# Altium PCB relay.PcbDoc
Units mil, origin at the board's own origin, x right, y up, seen from the top; angles counter-clockwise.
Board outline 787.4 x 2755.91 mil, 2 copper layers (Top Layer, Bottom Layer); 6 components, 5 nets, 14 pads, 0 vias.
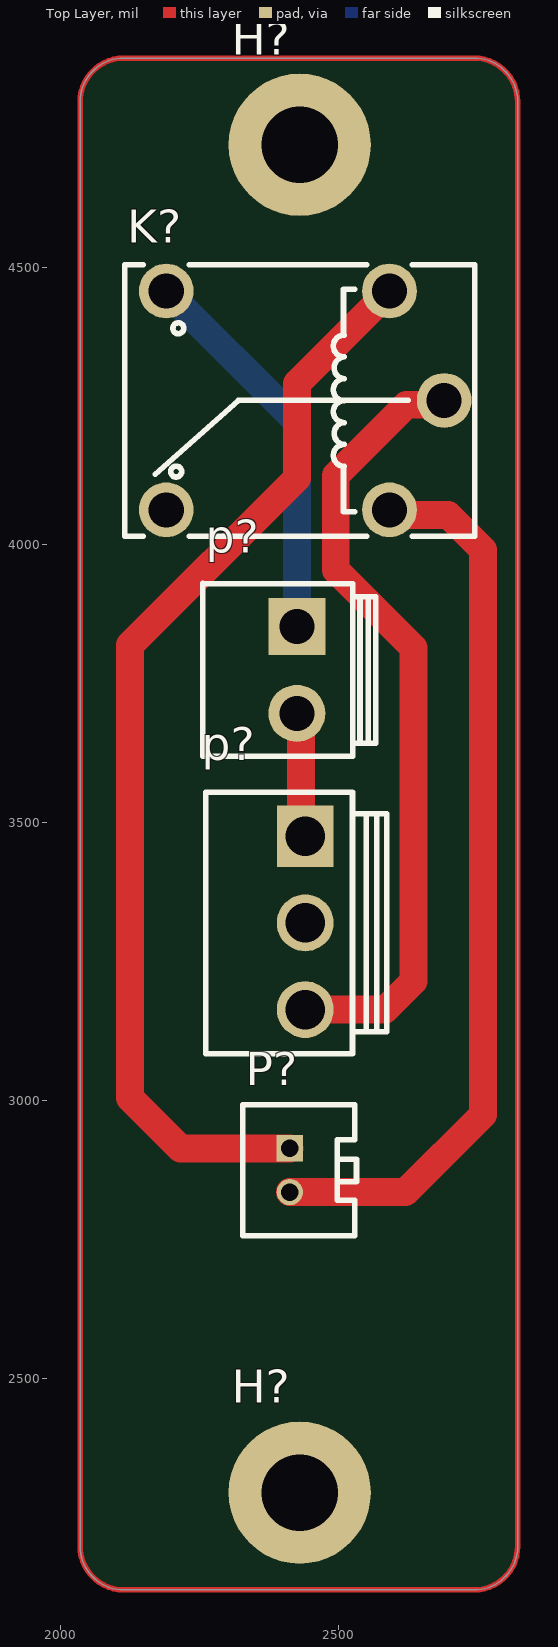
[diagram p0: Top Layer view]
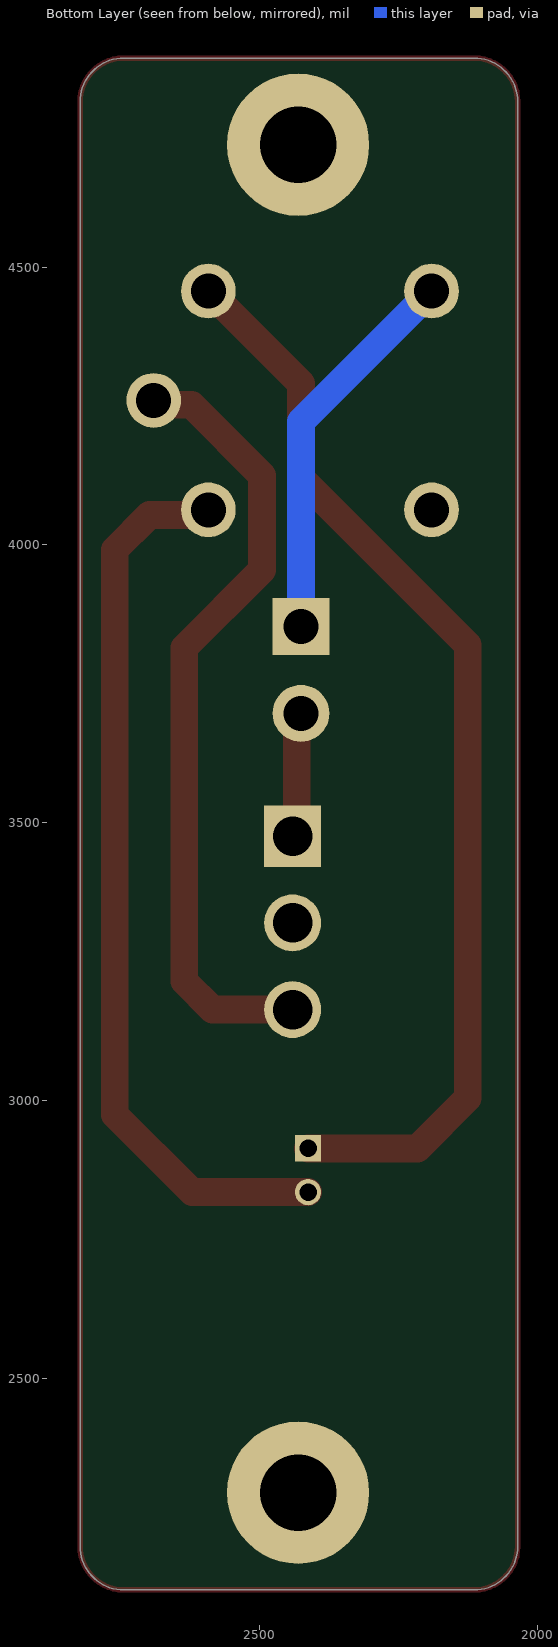
[diagram p1: Bottom Layer view, seen from below]
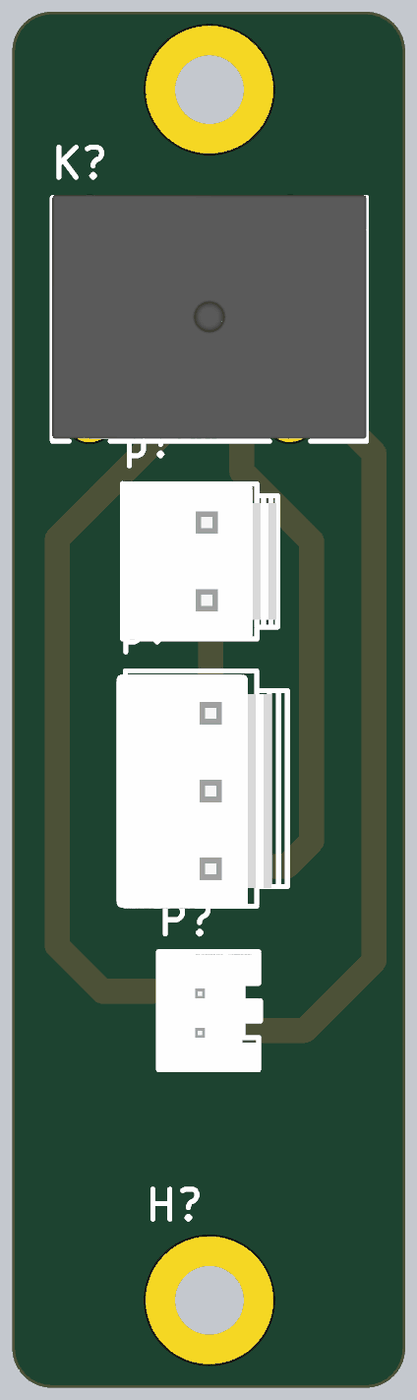
[diagram p2: 3D render of the assembled board from above, using the file's embedded part models]

## Layer stack, top to bottom
Top Solder: solder mask 0.4, Solder Resist, Dk 3.5
Top Layer: signal copper 1.4
Dielectric 1: dielectric 12.6, FR-4, Dk 4.8
Bottom Layer: signal copper 1.4
Bottom Solder: solder mask 0.4, Solder Resist, Dk 3.5

## Board outline
2035,2198.74 2035,4797.17 cw(c2113.74,4797.17) 2113.74,4875.91 2743.66,4875.91 cw(c2743.66,4797.17) 2822.4,4797.17 2822.4,2198.74 cw(c2743.66,2198.74) 2743.66,2120 2113.74,2120 cw(c2113.74,2198.74)

## Design rules (kind name [scope] priority, off if disabled: settings)
Clearance [All] p1: gap=6 ignorepadtopadclearanceinfootprint=FALSE
PlaneClearance [All] p1: clearance=3
PlaneConnect [All] p1: planeconnectstyle=Direct reliefexpansion=20 reliefentries=4 reliefconductorwidth=10 reliefairgap=10
PolygonConnect [All] p1: connectstyle=Direct reliefconductorwidth=10 reliefentries=4 polygonreliefangle="90 Angle" airgapwidth=10
RoutingVias [All] p1: holewidth=28 width=50 viastyle="Through Hole" minholewidth=28 minwidth=50 maxholewidth=28 maxwidth=50
SolderMaskExpansion [All] p1: expansion=4 istentingtop=FALSE
Width [All] p1: maxlimit=50 minlimit=6 preferedwidth=10
28 further rules are at their usual default settings.

## Components (designator, comment, footprint, x,y, rotation, side; value= is the part's Value field where it differs from the comment)
H? "HOLE" HOLE_3.5mm 2430.16,4720 r0 top
H? "HOLE" HOLE_3.5mm 2430.16,2295 r0 top
K? "SRA-12VDC-CL" RELAY-TH_SRA-X-CX 2440,4260 r180 top
p? "ZX-VH3.96-2PZZ" CONN-TH_2P-P3.96_MEGASTAR_ZX-VH3.96-2PZZ 2425,3775 r270 top
p? "ZX-VH3.96-3PZZ" CONN-TH_3P-P3.96_FWF39601-S03S22W1B 2440,3320 r270 top
P? "ZX-HY2.0-2PZZ" CONN-TH_2P-P2.00_ZX-HY2.0-2PZZ 2412.31,2875 r90 top

## Footprints (in the part's own frame and the unit in brackets; to place one, negate y for a bottom-side part, rotate by r counter-clockwise, add the part's x,y. Pads: shape width x height; smd on the part's side, far side on the other; paste and mask are expansions set on the pad)
CONN-TH_2P-P2.00_ZX-HY2.0-2PZZ [mm]
  rect 1.2x1.2 hole 0.8: 1(1,0)
  round 1.2 hole 0.8: 2(-1,0)
  silkscreen extent -3,-3.05 3,2.14, body extent -3.13,-2.93 2.88,2.17, height 8
CONN-TH_2P-P3.96_MEGASTAR_ZX-VH3.96-2PZZ [mm]
  rect 2.6x2.6 hole 1.6 paste-2539.97 mask+0.05: 1(-1.98,0)
  round 2.6 hole 1.6 paste-2539.97 mask+0.05: 2(1.98,0)
  silkscreen extent -3.96,-4.3 3.94,3.6, body extent -3.96,-4.35 3.97,3.55, height 2.65
CONN-TH_3P-P3.96_FWF39601-S03S22W1B [mm]
  rect 2.8x2.6 hole 1.8: 1(-3.96,0)
  round 2.6 hole 1.8: 2(0,0) 3(3.96,0)
  silkscreen extent -5.98,-4.54 5.98,3.72, body extent -5.81,-4.99 6.08,2.91, height 12.21
HOLE_3.5mm [mm]
  round 6.5 hole 3.5: 1(0,0)
RELAY-TH_SRA-X-CX [mm]
  round 2.5 hole 1.6: 1(6.35,-5) 2(6.35,5) 3(-3.851,5) 4(-3.851,-5) 5(-6.35,-0.001)
  silkscreen extent -7.75,-6.2 8.25,6.2, body extent -7.75,-6.33 8.25,6.08, height 14.5

## Part data
H? H?: "固定孔"
K?: library part 继电器, "12v", Coil Rated Power=600mW, Coil Resistance=240Ω, Coil Voltage=12V, Contact Rating=-, Contact Resistance=100mΩ, JLCPCB Part Class="Extended Part", LCSC Part Name=黑色, Manufacturer=松乐, Maximum Switching Current=10A, Maximum Switching Voltage=125V@AC, Operating Temperature=-40℃~+85℃, Add into BOM=yes, Coil Type=无极性-单线圈, Contact Form=一组转换:1C(单刀双掷-转换), Convert to PCB=yes, Datasheet=https://atta.szlcsc.com/upload/public/pdf/source/20180525/C99666_083B3C24D5AD4D7A00C20E2707DD072C.pdf, Device=SRA-12VDC-CL, Manufacturer Part=SRA-12VDC-CL, Operate Time=10ms, Pin Number=5, Release Time=10ms, Supplier=LCSC, Supplier Footprint=插件,12.4x16mm, Supplier Part=C60169, Symbol=SRA-12VDC-CL
p?: library part VH3.96-2PZZ, "2p", Current Rating (Max)=3A, JLCPCB Part Class="Extended Part", Manufacturer=Megastar(兆星), Operating Temperature Range=-25℃~+85℃, Add into BOM=yes, Contact Material=黄铜, Contact Plating=锡, Convert to PCB=yes, Datasheet=https://atta.szlcsc.com/upload/public/pdf/source/20230619/B0F65C0388219DF8CB89B38B943D83C5.pdf, Device=ZX-VH3.96-2PZZ, LCSC Part Name=ZX-VH3.96-2PZZ, Manufacturer Part=ZX-VH3.96-2PZZ, Mounting Style=直插, Number of Pins=2P, Number of PINs Per Row=2, Number of Rows=1, Pins Structure=1x2P, Pitch=3.96mm, Reference Series=VH, Row Spacing=-, Supplier=LCSC, Supplier Footprint=插件,P=3.96mm, Supplier Part=C7429660, Symbol=ZX-VH3.96-2PZZ
p?: library part "VH3.96-3P ZZ", Current Rating (Max)=7A, JLCPCB Part Class="Extended Part", LCSC Part Name="1x3P 间距:3.96mm 直插 系列:VH", Manufacturer="SHOU HAN(首韩)", Operating Temperature Range=-25℃~+85℃, Add into BOM=yes, Contact Material=黄铜, Contact Plating=锡, Convert to PCB=yes, Datasheet=https://atta.szlcsc.com/upload/public/pdf/source/20230323/0E3E4D4D36660133C8ECF6E8E2FE008C.pdf, Device="VH3.96-3P ZZ", Manufacturer Part="VH3.96-3P ZZ", Mounting Style=直插, Number of Pins=3P, Number of PINs Per Row=3, Number of Rows=1, Pins Structure=1x3P, Pitch=3.96mm, Reference Series=VH, Row Spacing=3.96mm, Supplier=LCSC, Supplier Footprint=插件,P=3.96mm, Supplier Part=C5379869, Symbol="VH3.96-3P ZZ"
P?: library part HY2.0-2PZZ, "2p", Current Rating (Max)=2A, JLCPCB Part Class="Extended Part", LCSC Part Name="1x2P 间距:2mm 直插 系列:HY", Manufacturer=Megastar(兆星), Operating Temperature Range=-25℃~+85℃, Add into BOM=yes, Contact Material=黄铜, Contact Plating=锡, Convert to PCB=yes, Datasheet=https://atta.szlcsc.com/upload/public/pdf/source/20230619/DEC43A5E9BAFB7A5BDB16FEDBE15E2A0.pdf, Device=ZX-HY2.0-2PZZ, Manufacturer Part=ZX-HY2.0-2PZZ, Mounting Style=直插, Name=ZX-HY2.0-2PZZ, Number of Pins=2P, Number of PINs Per Row=2, Number of Rows=1, Pins Structure=1x2P, Pitch=2mm, Reference Series=HY, Row Spacing=-, Supplier=LCSC, Supplier Footprint=插件,P=2mm, Supplier Part=C7429578, Symbol=ZX-HY2.0-2PZZ

## Nets (pads, with @x,y where several pads share a name; then routed paths per layer and width w, separated by ;. In a path a pad name is that pad's centre, name@x,y a point inside that pad or via, vN(x,y) a via of type N, cw(c..) or ccw(c..) an arc to the next point about the centre after c; other vN are vias at no path point)
NetK?_1: K?.1 p?.1@2425,3852.95 | length 701.2
  Bottom Layer w50: K?.1 2425,4221.85 p?.1@2425,3852.95
NetK?_3: K?.3 P?.2 | length 1619.9
  Top Layer w50: P?.2 2620.63,2835.63 2760,2975 2760,3991.26 2697.38,4053.88 2600.87,4053.88 K?.3
NetK?_4: K?.4 P?.1 | length 1970
  Top Layer w50: P?.1 2215.63,2914.37 2125,3005 2125,3820 2425,4120 2425,4290.25 K?.4
NetK?_5: K?.5 p?.3 | length 1435
  Top Layer w50: p?.3 2584.09,3164.09 2635,3215 2635,3815 2495,3955 2495,4125 2622.19,4252.19 2682.14,4252.19 K?.5
Netp?_1: p?.1@2440,3475.91 p?.2@2425,3697.04 | length 227.3
  Top Layer w50: p?.2@2425,3697.04 2432.5,3689.54 2432.5,3483.41 p?.1@2440,3475.91
pads on no net: H?.1 K?.2 p?.2@2440,3320
copper on no net: | length 6951.4
  Top Layer w10: 2035,2198.74 ccw(c2113.74,2198.74) 2113.74,2120 2743.66,2120 ccw(c2743.66,2198.74) 2822.4,2198.74 2822.4,4797.17 ccw(c2743.66,4797.17) 2743.66,4875.91 2113.74,4875.91 ccw(c2113.74,4797.17) 2035,4797.17 2035,2198.74